# Altium PCB signal_proccessing.PcbDoc
Units mil, origin at the board's own origin, x right, y up, seen from the top; angles counter-clockwise.
Board outline 1992 x 2025 mil, 2 copper layers (Top Layer, Bottom Layer); 49 components, 27 nets, 186 pads, 391 vias.
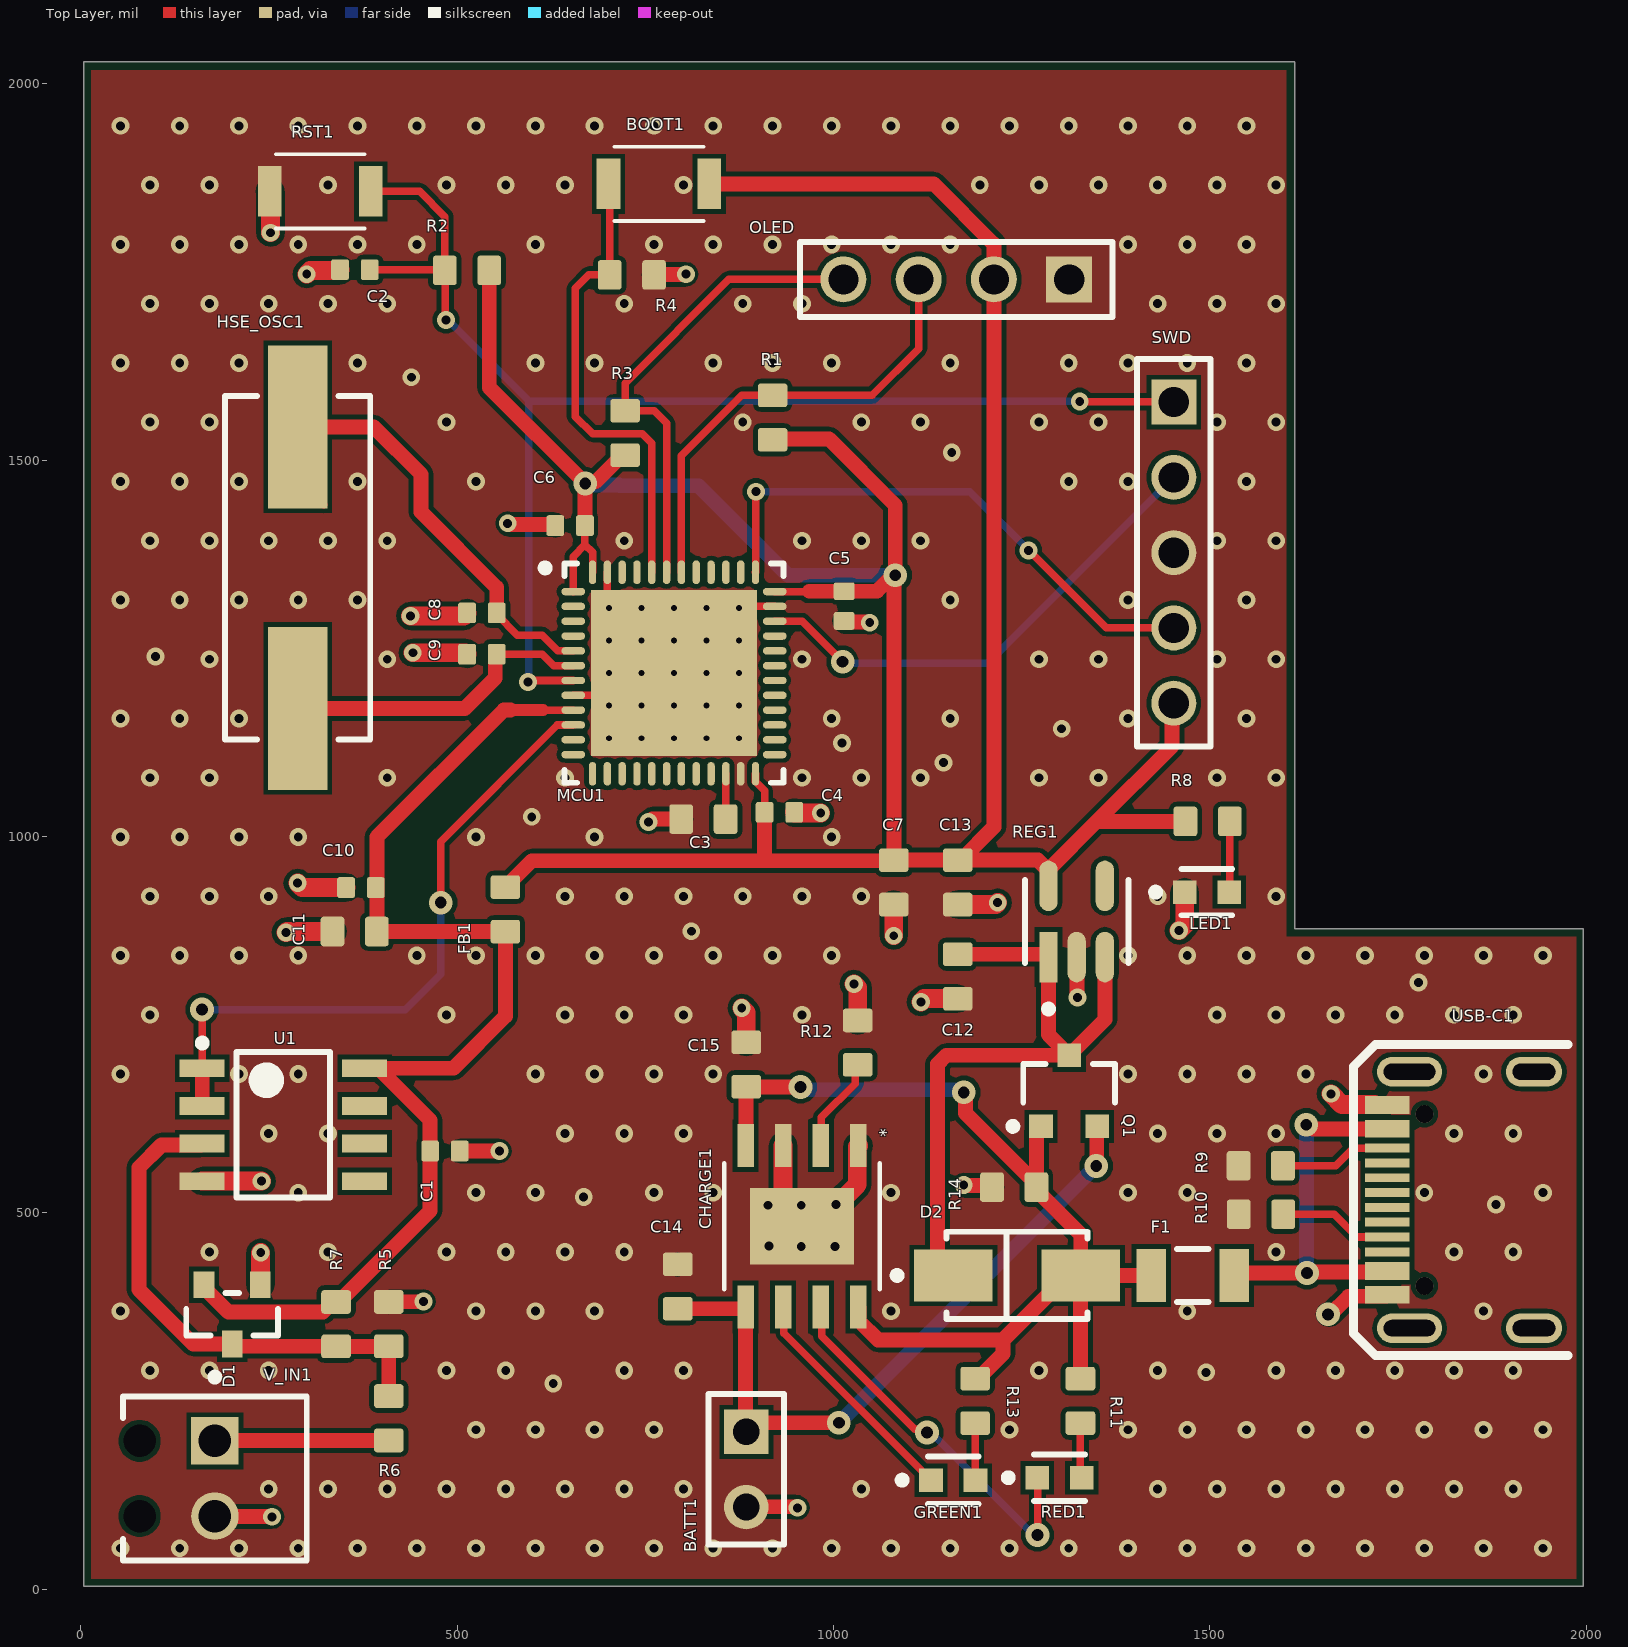
[diagram p0: Top Layer view]
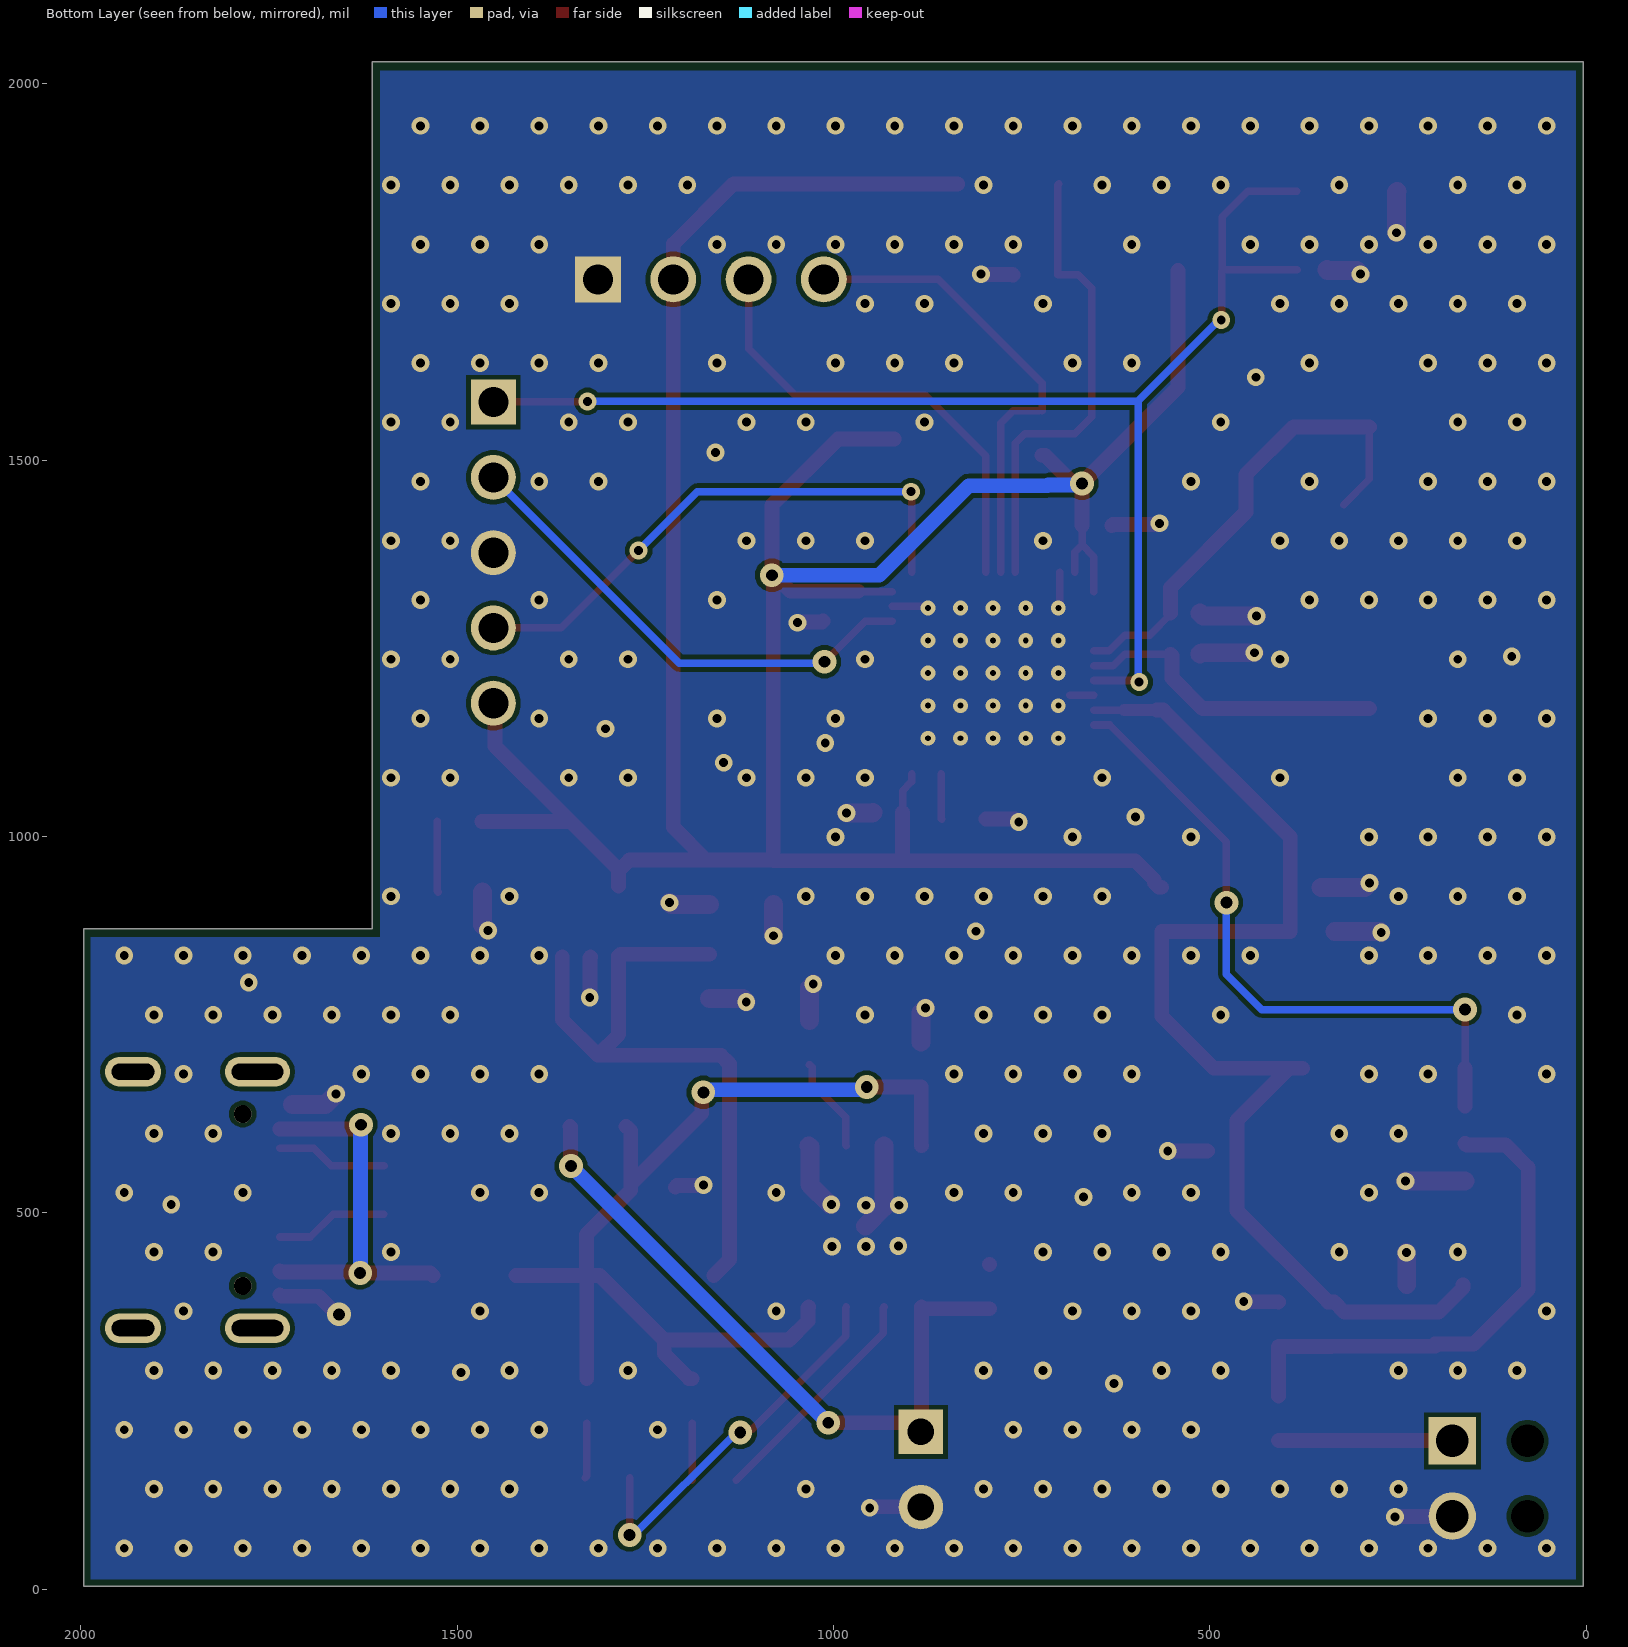
[diagram p1: Bottom Layer view, seen from below]
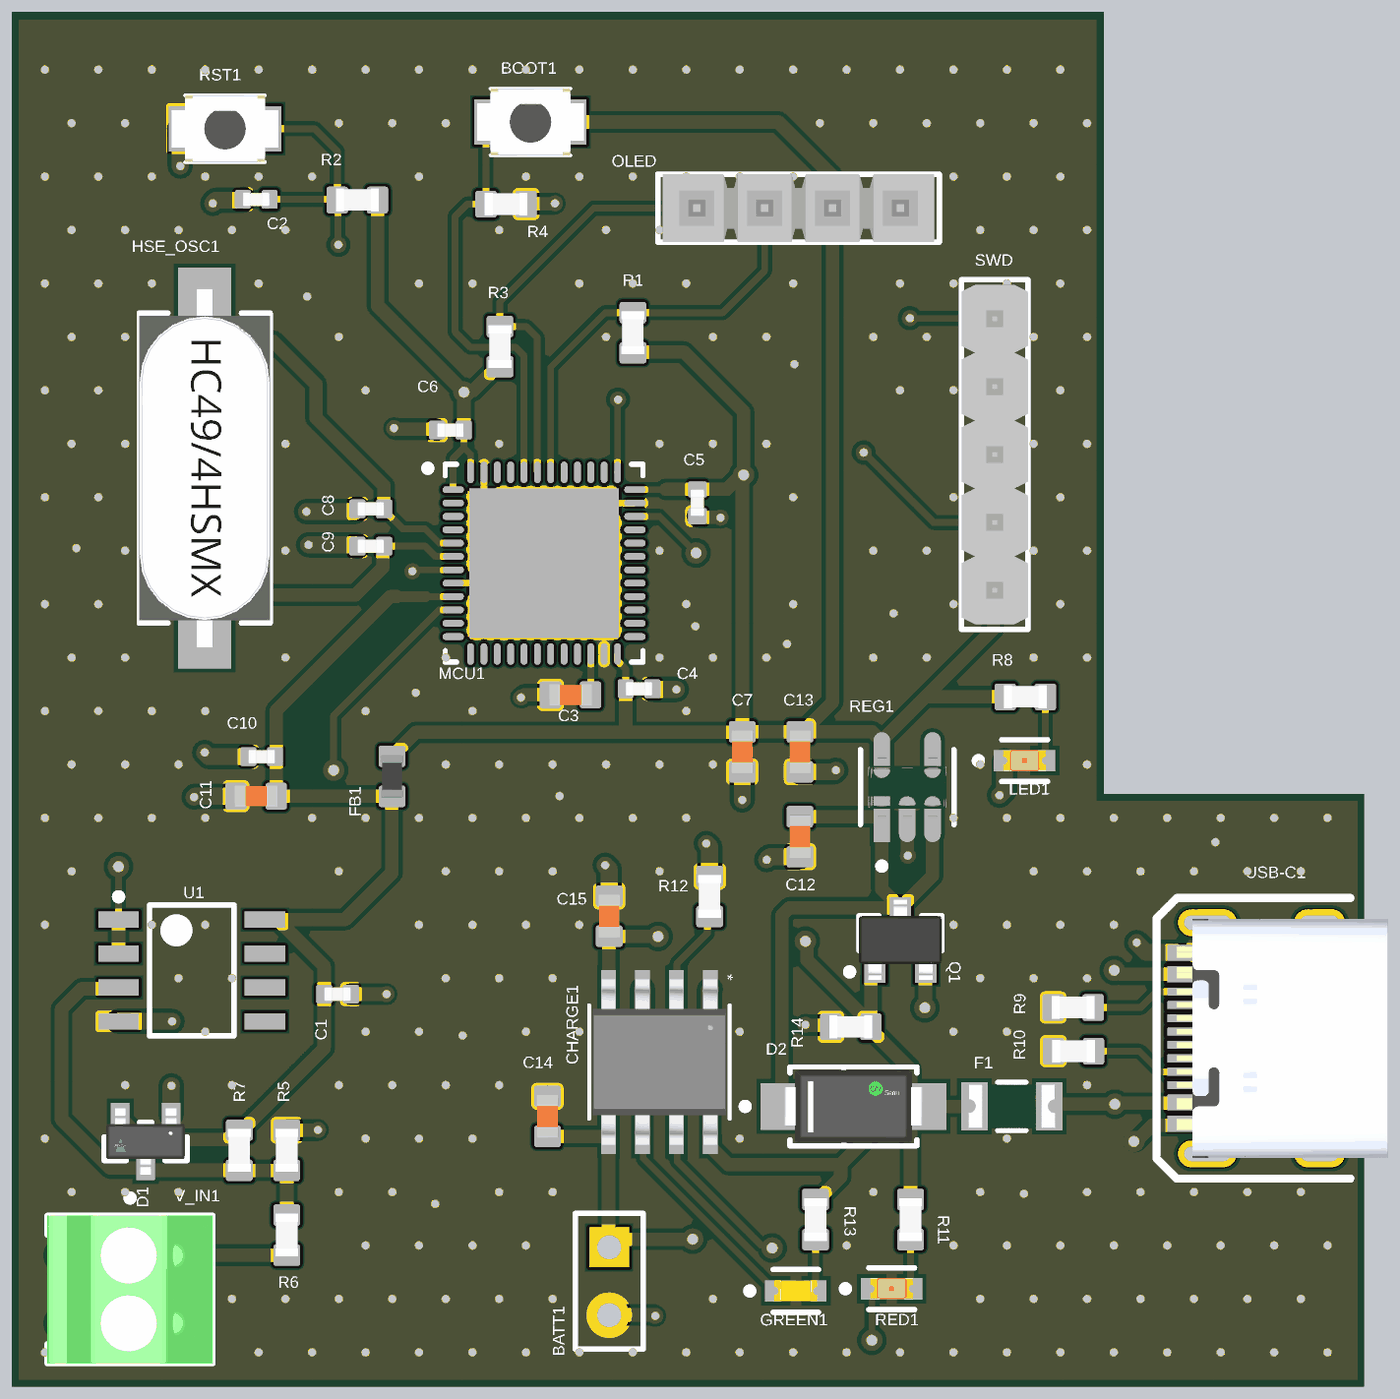
[diagram p2: 3D render of the assembled board from above, using the file's embedded part models]

## Layer stack, top to bottom
Top Solder: solder mask 0.4, Solder Resist, Dk 3.5
Top Layer: signal copper 1.4
Dielectric 1: dielectric 12.6, FR-4, Dk 4.8
Bottom Layer: signal copper 1.4
Bottom Solder: solder mask 0.4, Solder Resist, Dk 3.5

## Board outline
4,4 4,2029 1613,2029 1613,877 1996,877 1996,4

## Design rules (kind name [scope] priority, off if disabled: settings)
Clearance [All] p1: gap=6 ignorepadtopadclearanceinfootprint=FALSE
MinimumSolderMaskSliver [All] p1: minsoldermaskwidth=1
PlaneConnect [All] p1: planeconnectstyle=Direct reliefexpansion=20 reliefentries=4 reliefconductorwidth=10 reliefairgap=10
PolygonConnect [All] p1: connectstyle=Direct reliefconductorwidth=10 reliefentries=4 polygonreliefangle="90 Angle" airgapwidth=10
RoutingVias [All] p1: holewidth=28 width=50 viastyle="Through Hole" minholewidth=0 minwidth=0 maxholewidth=393.7 maxwidth=393.7
SilkToSilkClearance [All] p1: silktosilkclearance=4
SilkToSolderMaskClearance [IsPad] p1: minsilkscreentomaskgap=6 clearancetoexposedcopper=TRUE
SolderMaskExpansion [All] p1: expansion=4 istentingtop=FALSE
SupplyNets "Schematic Supply Nets_3" [InNet('3V3')] p1: voltage=0.000
SupplyNets "Schematic Supply Nets_2" [InNet('5V')] p2: voltage=0.000
SupplyNets "Schematic Supply Nets_1" [InNet('GND')] p3: voltage=0.000
SupplyNets "Schematic Supply Nets" [InNet('VBUS')] p4: voltage=0.000
Width [All] p1: maxlimit=25 minlimit=2 preferedwidth=10 bottomlayer_minwidth=6 minimp=50.000000 maximp=50.000000 favimp=50.000000
26 further rules are at their usual default settings.

## Components (designator, comment, footprint, x,y, rotation, side; value= is the part's Value field where it differs from the comment)
BATT1 "Header 2" HDR1X2 884,209 r270 top
BOOT1 "B3U-1000PM" SW_B3U-1000PM 768,1867 r0 top
C1 "100nF" CAP_0402 483.69,582 r180 top
C2 "100nF" CAP_0402 364,1753 r0 top
C3 "2.2uF" CAP_0603 827,1023 r0 top
C4 "100nF" CAP_0402 928,1032 r180 top
C5 "100nF" CAP_0402 1014,1306 r90 top
C6 "100nF" CAP_0402 650,1413 r0 top
C7 "10uF" CAP_0603 1080,939 r90 top
C8 "12pF" CAP_0402 532.68,1297 r0 top
C9 "12pF" CAP_0402 532.68,1242 r0 top
C10 "100nF" CAP_0402 372,932 r0 top
C11 "1uF" CAP_0603 363.7,873.7 r0 top
C12 "1uF" CAP_0603 1165,814 r270 top
C13 "10uF" CAP_0603 1165,939 r90 top
C14 "10uF" CAP_0603 793,402 r90 top
C15 "10uF" CAP_0603 884,697 r270 top
CHARGE1 "TP4056" ESOP8_UMW 958,482 r270 top
D1 "BAT54S-E3-08" FP-6_541-5014_01-4-MFG 201,365 r270 top value=10pF
D2 "SS14" FP-403AE-MFG 1243.79,416.67 r180 top
F1 "1206L050/15YR" FP-1206L-MFG 1477.22,416.67 r180 top value=0.15-0.75Ω
FB1 "FB0603" FB_0603 564,903 r90 top
GREEN1 "LTST-C191GKT" FP-LTST-C191GKT-MFG 1159,144.74 r0 top
HSE_OSC1 "LFXTAL003210BULK" FP-LFXTAL003210BULK-MFG 288,1357 r270 top
LED1 "LTST-C191KRKT" FP-LTST-C191KRKT-MFG 1496,926 r0 top
MCU1 "STM32F411CEU6" STM-UFQFPN48_L 788,1217 r0 top locked
OLED "TSW-104-08-F-S" SMTC-TSW-104-08-X-S 1313,1740 r180 top
Q1 "AO3401A" AO-SOT-23-3L_V 1313,662 r90 top
R1 "4.7k" RES_0603 918.94,1556.53 r270 top
R2 "10k" RES_0603 513,1752 r0 top
R3 "4.7k" RES_0603 723,1536 r90 top
R4 "10k" RES_0603 732,1746 r0 top
R5 "28.7k" RES_0603 409,352 r270 top
R6 "100k" RES_0603 409,227 r270 top
R7 "22k" RES_0603 339,352 r90 top
R8 "1k" RES_0603 1497,1020 r0 top
R9 "5.1k" RES_0603 1567.56,562.37 r180 top
R10 "5.1k" RES_0603 1568,498 r180 top
R11 "1k" RES_0603 1328,250 r270 top
R12 "2.4k" RES_0603 1032,726 r270 top
R13 "1k" RES_0603 1188,250 r90 top
R14 "100k" RES_0603 1240,534 r180 top
RED1 "LTST-C191KRKT" FP-LTST-C191KRKT-MFG 1300.14,148.02 r0 top
REG1 "AP2112K-3.3TRG1" FP-SOT25-IPC_A 1323,887 r90 top
RST1 "B3U-1000PM" SW_B3U-1000PM 318,1857 r0 top
SWD "MTLW-105-05-T-S-190" SMTC-MTLW-105-05-X-S-190 1452,1577 r270 top
U1 "LMV358DR2G" ONSC-SOIC-8-751-07_V 269,617 r0 top
USB-C1 "TYPE-C-31-M-12" TYPE-C-31-M-12 1848,517 r90 top
V_IN1 "1725656" PHOE-1725656-2 178,147 r270 top

## Footprints (in the part's own frame and the unit in brackets; to place one, negate y for a bottom-side part, rotate by r counter-clockwise, add the part's x,y. Pads: shape width x height; smd on the part's side, far side on the other; paste and mask are expansions set on the pad)
AO-SOT-23-3L_V [mm] "SOT23, 3-Leads, Body 3.1x1.8mm, Pitch 0.95mm"
  rect 0.8x0.8 smd: 1(-1.2,0.95) 2(-1.2,-0.95) 3(1.2,0)
  silkscreen extent -1.32,-1.55 0.9,2.02, body extent -1.5,-1.55 1.5,1.55, height 1.25
CAP_0402 [mm]
  rrect25% 0.6x0.7 smd: 1(-0.5,0) 2(0.5,0)
  body extent -0.5,-0.26 0.5,0.26, height 0.37
CAP_0603 [mm]
  rrect25% 0.8x1 smd: 1(-0.75,0) 2(0.75,0)
  body extent -0.8,-0.4 0.8,0.4, height 0.51
ESOP8_UMW [mil]
  rect 57.28x21.97 smd paste+0 mask+0: 1(-107.14,75) 2(-107.14,25) 3(-107.14,-25) 4(-107.14,-75) 5(107.14,-75) 6(107.14,-25) 7(107.14,25) 8(107.14,75)
  rect 102x138 smd paste-68.5 mask+0: 9(0,0)
  silkscreen extent -84,-104 84,104, body extent -122,-99 122,99, height 67
FB_0603 [mm]
  rrect25% 0.8x1 smd: 1(-0.75,0) 2(0.75,0)
  body extent -0.8,-0.4 0.8,0.4, height 0.81
FP-6_541-5014_01-4-MFG [mm]
  rect 0.9x0.7 smd paste+0 mask+0: 1(-1,0.95) 2(-1,-0.95) 3(1,0)
  silkscreen extent -0.71,-1.55 0.71,1.55, body extent -1.55,-1.65 1.55,1.65, height 0.25
FP-403AE-MFG [mm]
  rect 2.65x1.75 smd paste+0 mask+0: 1(-2.15,0) 2(2.15,0)
  silkscreen extent -2.37,-1.48 4.17,1.48, body extent -3.57,-1.58 3.57,1.58, height 0.25
FP-1206L-MFG [mm]
  rect 1x1.8 smd paste+0 mask+0: 1(-1.4,0) 2(1.4,0)
  silkscreen extent -0.53,-0.9 0.53,0.9, body extent -2,-1 2,1, height 0.25
FP-LFXTAL003210BULK-MFG [mm]
  rect 5.5x2 smd paste+0 mask+0: 1(-4.75,0) 2(4.75,0)
  silkscreen extent -5.8,-2.45 5.8,2.45, body extent -7.6,-2.55 7.6,2.55, height 0.25
FP-LTST-C191GKT-MFG [mm]
  rect 0.8x0.8 smd paste+0 mask+0: 1(-0.75,0) 2(0.75,0)
  silkscreen extent -1.85,-0.8 0.85,0.8, body extent -1.25,-0.55 1.25,0.55, height 0.25
FP-LTST-C191KRKT-MFG [mm]
  rect 0.8x0.8 smd paste+0 mask+0: 1(-0.75,0) 2(0.75,0)
  silkscreen extent -1.86,-0.78 0.86,0.78, body extent -1.25,-0.55 1.25,0.55, height 0.25
FP-SOT25-IPC_A [mm]
  rect 1.707x0.616 smd paste+0 mask+0: 1(-1.201,0.95)
  rrect100% 1.707x0.616 smd paste+0 mask+0: 2(-1.201,0) 3(-1.201,-0.95) 4(1.201,-0.95) 5(1.201,0.95)
  silkscreen extent -3.08,-1.75 1.4,1.75, body extent -2.55,-2 2.55,2, height 0.25
HDR1X2 [mm] "Connector; Header; 2 Position"
  rect 1.5x1.5 hole 0.9: 1(0,0)
  round 1.5 hole 0.9: 2(2.54,0)
  silkscreen extent -1.27,-1.27 3.81,1.27
ONSC-SOIC-8-751-07_V [mm] "SOIC, 8-Leads, Body 4.9x3.9mm, Pitch 1.27mm"
  rect 1.52x0.6 smd: 1(-2.74,1.905) 2(-2.74,0.635) 3(-2.74,-0.635) 4(-2.74,-1.905) 5(2.74,-1.905) 6(2.74,-0.635) 7(2.74,0.635) 8(2.74,1.905)
  silkscreen extent -2.86,-2.45 1.58,2.88, body extent -1.95,-2.45 1.95,2.45, height 1.75
PHOE-1725656-2 [mm] "Connector, 2-Leads, Body 6.2x5.4mm, Pitch 2.54mm"
  rect 1.6x1.6 hole 1.1: 1(-1.27,0)
  round 1.6 hole 1.1: 2(1.27,0)
  round 0 hole 1.1 unplated: MH1(-1.27,-2.54) MH2(1.27,-2.54)
  silkscreen extent -3.54,-3.1 2.77,3.1, body extent -2.77,-3.1 2.77,3.1, height 9
RES_0603 [mm]
  rrect25% 0.8x1 smd: 1(-0.75,0) 2(0.75,0)
  body extent -0.8,-0.43 0.8,0.43, height 0.52
SMTC-MTLW-105-05-X-S-190 [mm] "Terminal Assembly, 1x5 Pins, Vertical, 2.54mm Pitch, Male"
  rect 1.52x1.52 hole 1.02: 1(0,0)
  round 1.52 hole 1.02: 2(2.54,0) 3(5.08,0) 4(7.62,0) 5(10.16,0)
  silkscreen extent -1.46,-1.24 11.62,1.24, body extent -1.27,-1.24 11.43,1.24, height 6.35
SMTC-TSW-104-08-X-S [mm] ".025 SQ Post Terminal Strip Assembly, 1x4 Pins, Vertical, 2.54mm Pitch, Male"
  rect 1.55x1.55 hole 1.02: 1(0,0)
  round 1.55 hole 1.02: 2(2.54,0) 3(5.08,0) 4(7.62,0)
  silkscreen extent -1.46,-1.27 9.08,1.27, body extent -1.27,-1.27 8.89,1.27, height 8.38
STM-UFQFPN48_L [mm] "QFN, 48-Leads, Body 7.1x7.1mm, Pitch 0.5mm, Thermal Pad 5.6x5.6mm, IPC High Density"
  oval 0.8x0.25 smd: 1(-3.4,2.75) 2(-3.4,2.25) 3(-3.4,1.75) 4(-3.4,1.25) 5(-3.4,0.75) 6(-3.4,0.25) 7(-3.4,-0.25) 8(-3.4,-0.75) 9(-3.4,-1.25) 10(-3.4,-1.75) 11(-3.4,-2.25) 12(-3.4,-2.75) 25(3.4,-2.75) 26(3.4,-2.25) 27(3.4,-1.75) 28(3.4,-1.25) 29(3.4,-0.75) 30(3.4,-0.25) 31(3.4,0.25) 32(3.4,0.75) 33(3.4,1.25) 34(3.4,1.75) 35(3.4,2.25) 36(3.4,2.75)
  oval 0.25x0.8 smd: 13(-2.75,-3.4) 14(-2.25,-3.4) 15(-1.75,-3.4) 16(-1.25,-3.4) 17(-0.75,-3.4) 18(-0.25,-3.4) 19(0.25,-3.4) 20(0.75,-3.4) 21(1.25,-3.4) 22(1.75,-3.4) 23(2.25,-3.4) 24(2.75,-3.4) 37(2.75,3.4) 38(2.25,3.4) 39(1.75,3.4) 40(1.25,3.4) 41(0.75,3.4) 42(0.25,3.4) 43(-0.25,3.4) 44(-0.75,3.4) 45(-1.25,3.4) 46(-1.75,3.4) 47(-2.25,3.4) 48(-2.75,3.4)
  rect 5.6x5.6 smd: 49(0,0)
  silkscreen extent -4.47,-3.7 3.7,3.7, body extent -3.55,-3.55 3.55,3.55, height 0.6
SW_B3U-1000PM [mm]
  rect 0.8x1.7 smd paste+0 mask+0.102: 1(-1.7,0) 2(1.7,0)
  silkscreen extent -1.5,-1.25 1.5,1.25, body extent -2,-1.25 2,1.25, height 1.75
TYPE-C-31-M-12 [mm]
  rect 0.6x1.5 smd mask+0.07: A1B12(-3.2,2.85) B1A12(3.2,2.85)
  rect 0.6x1.5 smd mask+0.14: A4B9(-2.4,2.85) B4A9(2.4,2.85)
  rect 0.3x1.5 smd mask+0.14: A5(-1.25,2.85) A6(-0.25,2.85) A7(0.25,2.85) A8(1.25,2.85) B5(1.75,2.85) B6(0.75,2.85) B7(-0.75,2.85) B8(-1.75,2.85)
  round 0.6 hole 0.6 unplated mask+0.3: MH(-2.9,1.6) MH(2.9,1.6)
  oval 1x1.9 hole 0.55 slot 1.45 at 90 deg mask+0.05: SH(-4.325,-2.1) SH(4.325,-2.1)
  oval 1x2.2 hole 0.55 slot 1.75 at 90 deg mask+0.05: SH(-4.325,2.1) SH(4.325,2.1)
  silkscreen extent -5.25,-3.25 5.25,4, body extent -4.47,-4.65 4.47,3.25, height 3.32

## Part data
BATT1: "Header, 2-Pin", LatestRevisionDate=17-Jul-2002, LatestRevisionNote="Re-released for DXP Platform.", Publisher="Altium Limited"
BOOT1 RST1: "Top, w/o Boss 1k Reel", Package="Custom Package Omron", Check_prices=https://www.snapeda.com/parts/B3U-1000PM/Omron/view-part/?ref=eda, MF=Omron, MP=B3U-1000PM, SnapEDA_Link=https://www.snapeda.com/parts/B3U-1000PM/Omron/view-part/?ref=snap
C1 C2 C4 C5 C6 C8 C9 C10: library part CAP_0402, "Capacitor SMD 0402"
C3 C7 C11 C12 C13 C14 C15: library part CAP_0603, "Capacitor SMD 0603"
CHARGE1: "Description", Manufacturer_Name="UMW(Youtai Semiconductor Co., Ltd.)", Copyright="Copyright (C) 2025 Ultra Librarian. All rights reserved.", Manufacturer_Part_Number=TP4056, RefDes=RefDes, Type="Power Management"
D1: library part CMP-02539-000028-1, "DIODE ARRAY SCHOTTKY 30V SOT23", Capacitance=10pF, Forward Current=200mA, Manufacturer=Vishay, Max Junction Temp=+125°C, Max Repetitive Reverse Voltage=30V, Max Surge Forward Current=600mA, Package=6.541-5014.01-4, Peak Reverse Current=2uA, Temperature="-55°C to +125°C", Temperature Range Low=-55°C, Automotive=No, Category=Diode, ComponentLink2Description=Datasheet, ComponentLink2URL=http://www.vishay.com/docs/85508/bat54.pdf, Device Class L1="Discrete Semiconductors", Device Class L2=Diodes, Device Class L3="Schottky Diodes", Digikey Description="DIODE ARRAY SCHOTTKY 30V SOT23", Height=1.15mm, Lead Free=Yes, Manufacturer Part Number=BAT54S-E3-08, Mouser Description="Schottky Diodes & Rectifiers 200mA 30 Volt", Octopart=https://octopart.com/bat54s-e3-08-vishay-29186616, RoHS=TRUE, Temperature Range High=+125°C
D2: library part CMP-2000-04943-2, "DIODE SCHOTTKY 40V 1A SMA", Forward Current=1A, Manufacturer="ON Semiconductor", Max Junction Temp=+125°C, Max Repetitive Reverse Voltage=40V, Max Surge Forward Current=40A, Package=403AE, Peak Reverse Current=0.2mA, Temperature="-65°C to +125°C", Temperature Range Low=-65°C, Automotive=No, Category=Diode, ComponentLink2Description=Datasheet, ComponentLink2URL=https://www.onsemi.com/pub/Collateral/SS19-D.PDF, Device Class L1="Discrete Semiconductors", Device Class L2=Diodes, Device Class L3="Schottky Diodes", Digikey Description="DIODE SCHOTTKY 40V 1A SMA", Height=2.5mm, Lead Free=Yes, Manufacturer Part Number=SS14, Mouser Description="Schottky Diodes & Rectifiers SMA 40V 1.0A", Octopart=https://octopart.com/ss14-on+semiconductor-29205033, RoHS=TRUE, Standoff Height=0.05mm, Temperature Range High=+125°C
F1: library part CMP-08606-000030-1, "PTC RESET FUSE 15V 500MA 1206", Ambient Temperature Range High=+85°C, Ambient Temperature Range Low=-40°C, Current Rating=100A, Hold Current=0.5A, Manufacturer="Littelfuse Inc", Package=1206L, Resistance=0.15-0.75Ω, Temperature="-40°C to +85°C", Trip Current=1A, Voltage Rating=15V, Automotive=No, Category=Fuse, ComponentLink2Description=Datasheet, ComponentLink2URL=https://www.littelfuse.com/~/media/electronics/datasheets/resettable_ptcs/littelfuse_ptc_1206l_datasheet.pdf.pdf, Device Class L1="Circuit Protection", Device Class L2="PTC Resettable Fuses", Device Class L3=unset, Digikey Description="PTC RESET FUSE 15V 500MA 1206", Height=0.75mm, Lead Free=Yes, Manufacturer Part Number=1206L050/15YR, Mouser Description="Resettable Fuses - PPTC 15V 1206 .500A POLYFUSE", Octopart=https://octopart.com/1206l050%2F15yr-littelfuse-673645, RoHS=TRUE, Temperature Range High=+85°C, Temperature Range Low=-40°C, Trip Time=0.1s
FB1: library part FB_0603, "Ferrite Bead SMD 0603"
GREEN1: library part CMP-22017-000029-1, "LED GREEN CLEAR CHIP SMD", Case Code (Metric)=1608, Case Code (Imperial)=0603, Color=Green, Forward Current=30mA, Forward Voltage=2.1V, Lens Color=Colorless, Max Operating Temperature=85°C, Min Operating Temperature=-55°C, Package Quantity=1, Power Dissipation=100mW, Reverse Voltage=5V, Test Current=20mA, Case/Package=0603, Depth=0.8mm, Dominant Wavelength=569nm, Height=0.55mm, Lead Free="Lead Free", Length=1.6mm, Lens Style=Clear, Lens Transparency=Clear, Luminous Intensity=12mcd, Mount="Surface Mount", Number of Elements=1, Number of LEDs=1, Number of Pins=2, Packaging="Tape and Reel", Power Rating=100mW, Radiation Hardening=No, Viewing Angle=130°, Wavelength=565nm, Width=0.8mm, Illumination Color=Green
HSE_OSC1: library part CMP-96504-000002-1, "CRYSTAL 12.0MHZ 16PF SMD", Frequency=12MHz, Load Capacitance=16pF, Manufacturer="IQD Frequency Products", Temperature="-10°C to +60°C", Temperature Range High=+60°C, Temperature Range Low=-10°C, Tolerance=30ppm, Automotive=No, Category=Crys, ComponentLink2Description=Datasheet, ComponentLink2URL=https://www.iqdfrequencyproducts.com/products/pn/LFXTAL003210Bulk.pdf, Device Class L1="Passive Components", Device Class L2="Crystals / Oscillators", Device Class L3=Crystals, Digikey Description="CRYSTAL 12.0MHZ 16PF SMD", Esr=40Ω, Height=4.3mm, Lead Free=Yes, Manufacturer Part Number=LFXTAL003210BULK, Octopart=https://octopart.com/lfxtal003210bulk-iqd+frequency+products-20904063, Package=LFXTAL003210BULK, RoHS=TRUE, Series=HC49/4HSMX, Stability=50ppm
LED1 RED1: library part CMP-2000-05199-2, Case Code (Metric)=1608, Case Code (Imperial)=0603, Color=Red, Current=2A, Forward Current=20mA, Forward Voltage=2V, Lens Color=Colorless, Max Operating Temperature=85°C, Min Operating Temperature=-55°C, Power Dissipation=75mW, Reverse Voltage=5V, Case/Package=0603, Depth=800µm, Dominant Wavelength=631nm, Height=550µm, Lead Free="Lead Free", Length=1.6mm, Lens Style=Clear, Lens Transparency=Clear, Luminous Intensity=54mcd, Mount="Surface Mount", NexarPartId=549908, Number of Elements=1, Number of LEDs=1, Number of Pins=2, Packaging="Tape and Reel", Power Rating=75mW, Radiation Hardening=No, RoHS=Compliant, Schedule B="8541402000, 8541402000", Test Current=20mA, Viewing Angle=130°, Voltage=2V, Wavelength=639nm, Width=800µm, Illumination Color=Red
MCU1: library part CMP-0243-00165-1, "ARM Cortex-M4 32-bit MCU+FPU, 512 KB Flash, 128 KB RAM, 36 I/Os, 48-Pin UFQFPN, -40 to 85 degC, Tray", Operating Frequency(F) (Processor speed) (MHz)=100, Package Description=UFQFPN48, Package Reference="48-Pin Ultra Thin Fine Pitch Quad Flat No-Lead, 7 x 7 x 0.6 mm Body, 0.5 mm Pitch, Exposed Pad", Supply Voltage(Vcc) min (V)=1.7, I/Os (High Current)=36, ComponentLink1Description="Manufacturer URL", ComponentLink1URL=http://www.st.com/, ComponentLink2Description=Datasheet, ComponentLink2URL=http://www.st.com/st-web-ui/static/active/en/resource/technical/document/datasheet/DM00115249.pdf, Core="ARM Cortex-M4", DatasheetVersion="Rev. 6", FLASH Size (Prog) (kB)=512, Mounting Technology="Surface Mount", Packing=Tray, Internal RAM Size (kB)=128
OLED: library part CMP-1024-00355-1, "0.025\" SQ Post Header, Through-hole, Vertical, -55 to 125 degC, 2.54 mm Pitch, 4-Pin, Male, RoHS", Manufacturer=Samtec, Temperature Range="-55 to 125 degC", ComponentLink1Description="Manufacturer URL", ComponentLink1URL=http://www.samtec.com, ComponentLink2Description=Datasheet, ComponentLink2URL=http://www.samtec.com/documents/webfiles/pdf/TSW_TH.PDF, ComponentLink3Description="Package Specification", ComponentLink3URL=http://www.samtec.com/documents/webfiles/cpdf/TSW-XXX-XX-XXX-X-XX-XXX-MKT.pdf, DatasheetVersion=F-214, Mounting Technology=Through-hole, Orientation=Vertical, PackageDescription=".025[0.64] SQ. Post Terminal Strip Assembly", PackageReference=TSW-104-08-X-S, PackageVersion="DM, 8/1988", PartNumber=TSW-104-08-F-S, Pitch="2.54 mm", RoHS=True
Q1: library part CMP-2000-05778-1, "P-Channel MOSFET, 30 V, 4 A, -55 to 150 degC, 3-Pin SOT-23-3L, RoHS, Tape and Reel", Continuous Drain Current=4A, Drain-Source On-Volt=30V, Frequency (Max)=NotRequiredMHz, Gate-Source Voltage (Max)=?12V, Manufacturer="Alpha and Omega", Operating Temp Range=-55Cto150C, Operating Temperature Classification=Military, Output Power (Max)=NotRequiredW, Package Description="3-Pin Small Outline Transistor, Body 2.95 x 1.6 mm, Pitch 0.95 mm", Package Reference=SOT-23-3L, Package Type=SOT-23, Power Dissipation=1.4W, Power Gain=NotRequireddB, Channel Mode=Enhancement, Datasheet URL=http://www.aosmd.com/res/data_sheets/AO3401A.pdf, Datasheet Version="Rev. 3, 03/2011", Drain Current (Max)=4A, Drain Efficiency=NotRequired%, Drain-Source On-Res=0.044ohm, Manufacturer URL=http://www.aosmd.com/, Mounting=SurfaceMount, Mounting Technology=SurfaceMount, Noise Figure=NotRequireddB, Number of  Elements=1, Package URL=http://www.aosmd.com/res/packaging_information/SOT-23-3L.pdf, Pin Count=3, Polarity=P, Rad Hardened=No, Type=PowerMOSFET
R1 R2 R3 R4 R5 R6 R7 R8 R9 R10 R11 R12 R13 R14: library part RES_0603, "Resistor SMD 0603"
REG1: library part CMP-12756-000035-1, "IC REG LINEAR 3.3V 600MA SOT25", Case/Package=SOT-23-5, Dropout Voltage=250mV, Max Operating Temperature=85°C, Max Output Current=600mA, Max Input Voltage=6V, Min Operating Temperature=-40°C, Min Input Voltage=2.5V, Output Voltage=3.3V, Package Quantity=1, Quiescent Current=55uA, Accuracy=1.5%, Height=1.3mm, Lead Free="Lead Free", Length=3.1mm, Mount="Surface Mount", Number of Outputs=1, Number of Pins=5, Number of Regulators=1, Output Current=600mA, Output Type=Fixed, Packaging="Tape and Reel", Polarity=Positive, Width=1.7mm
SWD: library part CMP-1024-00077-1, "Low Profile .025\" SQ Post Header, Through-hole, Vertical, -55 to 105 degC, 2.54 mm Pitch, 5-Pin, Male, RoHS", Manufacturer=Samtec, Temperature Range="-55 to 105 degC", ComponentLink1Description="Manufacturer URL", ComponentLink1URL=http://www.samtec.com, ComponentLink2Description=Datasheet, ComponentLink2URL=http://www.samtec.com/documents/webfiles/pdf/MTLW_TH.PDF, ComponentLink3Description="Package Specification", ComponentLink3URL=http://www.samtec.com/documents/webfiles/cpdf/MTLW-1XX-XX-XX-X-XXX-XX-XX-MKT1.pdf, DatasheetVersion=F-214, Mounting Technology=Through-hole, Orientation=Vertical, PackageDescription="Low Profile Terminal Assembly", PackageReference=MTLW-105-05-X-S-190, PackageVersion="T, 6/1991", PartNumber=MTLW-105-05-T-S-190, Pitch="2.54 mm", RoHS=True
U1: library part CMP-1310-00286-1, "Dual Low-Voltage, Rail-to-Rail Operational Amplifier, 2.7 to 5.5 V, -40 to 85 degC, 8-Pin SOIC, Pb-Free, Tape and Reel", Manufacturer="On Semiconductor", ComponentLink1Description="Manufacturer URL", ComponentLink1URL=http://www.onsemi.com/, ComponentLink2Description=Datasheet, ComponentLink2URL=http://www.onsemi.cn/pub_link/Collateral/LMV321-LMV358-LMV324-D.PDF, ComponentLink3Description="Package Specification", ComponentLink3URL=http://www.onsemi.com/pub_link/Collateral/751-07.PDF, DatasheetVersion="Rev. 10", GBW Typ (MHz)=1, Mounting Technology="Surface Mount", PackageDescription="8-Pin Small Outline Integrated Circuit, Body 4.9 x 3.9 mm, Pitch 1.27 mm", PackageReference=SOIC-8-751-07, PackageVersion="Rev. AK, 02/2011", Packing="Tape and Reel", PartNumber=LMV358DR2G, RoHS=TRUE, SR Typ (V/uS)=1, VCC Max (V)=5.5, VCC Min (V)=2.7
USB-C1: "USB Type C Connector Horizontal SMT", Manufacturer="Koren Hroparts", Manufacturer Part Number=TYPE-C-31-M-12
V_IN1: library part CMP-2000-05299-1, "Male Header, Pitch 2.54 mm, 1 x 2 Position, Height 9 mm, Tail Length 3.5 mm", Colour=Green, Manufacturer="Phoenix Contact", Content=250pc(s), Datasheet URL=http://datasheet.octopart.com/1725656-Phoenix-Contact-datasheet-5302866.pdf, Datasheet Version=Apr-08, Manufacturer part No.=1725656, Manufacturer URL=http://www.phoenixcontact.com/, Number of contacts=2, Pitch=2.54mm, Type=MPT0,5/2-2,54, Industrial packaging=Yes

## Via types
v1: diameter 23.62, hole 11.81, Top Layer to Bottom Layer, tented both sides, 352 vias
v2: diameter 19.68, hole 7.87, Top Layer to Bottom Layer, tented both sides, 25 vias
v3: diameter 31.5, hole 15.75, Top Layer to Bottom Layer, tented both sides, 14 vias

## Nets (pads, with @x,y where several pads share a name; then routed paths per layer and width w, separated by ;. In a path a pad name is that pad's centre, name@x,y a point inside that pad or via, vN(x,y) a via of type N, cw(c..) or ccw(c..) an arc to the next point about the centre after c; other vN are vias at no path point)
3V3: BOOT1.2 C4.2 C5.2 C6.2 C7.2 C13.2 FB1.2 MCU1.1 MCU1.24 MCU1.36 MCU1.48 OLED.2 R1.2 R2.2 R3.1 R8.1 REG1.5 SWD.5 | length 4438.8
  Top Layer w10: MCU1.1 654.14,1371.77 669.69,1387.31 ; C6.2 669.69,1387.31 ; MCU1.48 679.73,1377.27 669.69,1387.31 ; MCU1.24 896.27,1072.47 896.35,1072.39 896.7,1072.39 908.31,1060.78 C4.2 ; MCU1.36 966.73,1325.27 967,1325
  Top Layer w19.68: R2.2 542.53,1596.47 v3(670,1469) ; FB1.2 567.94,932.53 573.84,938.43 573.84,942.37 599.16,967.69 908.31,967.69 ; C6.2 669.84,1413.16 669.84,1468.84 v3(670,1469) ; R3.1 719.06,1506.47 683.85,1471.26 672.26,1471.26 v3(670,1469) ; BOOT1.2 1133,1867 1213,1787 OLED.2 1213,1012.59 C13.2@1168.94,968.53 ; C4.2 908.31,967.69 ; R1.2@919.29,1528 994,1528 1082,1440 v3(1082,1347) ; 967.69,1325.69 C5.2 1057.49,1325.69 1078.8,1347 v3(1082,1347) ; C7.2@1079.16,967.69 908.31,967.69 ; REG1.5 REG1.5@1285.6,954.51 ; SWD.5 1449.82,1174.82 1449.82,1119.97 1349.85,1020 ; R8.1 1349.85,1020 ; v3(1082,1347) 1080.09,1345.09 1080.09,968.53 C13.2 C13.2@1168.94,968.53 ; C13.2@1168.94,968.53 1271.58,968.53 REG1.5@1285.6,954.51 ; REG1.5@1285.6,954.51 1285.6,955.75 1349.85,1020
  Bottom Layer w19.68: v3(670,1469) 672.26,1466.74 714.83,1466.74 715.57,1466 820.5,1466 939.5,1347 v3(1082,1347)
5V: C15.2 CHARGE1.4 CHARGE1.8 D2.1 F1.2 Q1.1 R11.1 R13.2 R14.1 | length 1419.1
  Top Layer w19.68: v3(956,667) 955.76,667.24 884.24,667.24 C15.2 883.5,666.97 CHARGE1.4@883.5,590.14 ; CHARGE1.8 1034.14,373.72 1034.14,356.06 1059.2,331 1225.05,331 ; v3(1173,660) 1175.26,657.74 1175.26,632.2 R14.1@1269.53,537.94 ; R13.2 1191.94,279.53 1225.05,312.64 1225.05,331 ; Q1.1 1269.53,608.68 R14.1@1269.53,537.94 ; R11.1 1328,416.24 D2.1 ; F1.2 D2.1 ; CHARGE1.4@883.5,590.14 883,589.64 CHARGE1.4 883.5,589.64 CHARGE1.4@883.5,590.14 ; 1225.05,331 1310.72,416.67 D2.1 ; R14.1@1269.53,537.94 R14.1 1269.53,530.06 1328.44,471.15 D2.1
  Bottom Layer w19.68: v3@956,668 960.5,663.5 1169.5,663.5 v3(1173,660)
ADC_CH1: MCU1.10 U1.1 U1.2 | length 880.9
  Top Layer w10: v3(161,770) 161,692.13 U1.1 ; v3(478,912) 478,992.91 633.11,1148.02 654.06,1148.02 MCU1.10
  Top Layer w19.68: U1.2 U1.1
  Bottom Layer w10: v3(161,770) 431,770 478,817 v3(478,912)
BAT+: BATT1.1 C14.1 CHARGE1.5 Q1.2 | length 920.9
  Top Layer w19.68: C14.1 881.86,372.47 CHARGE1.5@883,373.61 ; BATT1.1@883,209 CHARGE1.5@883,373.61 ; CHARGE1.5 CHARGE1.5@883,373.61 ; BATT1.1 896,221 v3(1007,221) ; v3(1349,562) 1349.7,562.7 1349.7,614.06 Q1.2
  Bottom Layer w19.68: v3(1007,221) 1007.5,221 1348.5,562 v3(1349,562)
BOOT0: BOOT1.1 MCU1.44 R4.1 | length 629.7
  Top Layer w10: BOOT1.1 702.47,1865.6 R4.1@702.47,1748.58 ; R4.1 675,1746 657,1728 657,1557.86 679.77,1535.09 745.71,1535.09 758.47,1522.33 MCU1.44
GND: BATT1.2 C1.1 C2.1 C3.1 C4.1 C5.1 C6.1 C7.1 C8.1 C9.1 C10.1 C11.1 C12.2 C13.1 C14.2 C15.1 CHARGE1.1 CHARGE1.3 CHARGE1.9 D1.1 LED1.1 MCU1.8 MCU1.23 MCU1.35 MCU1.47 MCU1.49 OLED.1 R4.2 R5.1 R9.2 R10.2 R12.1 R14.2 REG1.2 RST1.1 SWD.3 U1.4 USB-C1.A1B12 USB-C1.B1A12 V_IN1.2 | length 1851.1
  Top Layer w10: MCU1.8 MCU1.49@686,1187.47 ; MCU1.49@699.42,1305.58 MCU1.47 ; v2(874.61,1303.61) 876.58,1305.58 MCU1.35
  Top Layer w19.68: V_IN1.2 178.5,96.5 253.5,96.5 v1(254,96) ; R5.1 409.24,381.76 454.76,381.76 v1(455,382) ; C1.1 v1(556,582) ; v1(567,1416) 568.5,1414.5 628.82,1414.5 C6.1 ; v1(754,1019) 755.07,1019 759.07,1023 C3.1 ; R4.2 762.03,1746.5 803.5,1746.5 v1(804,1747) ; C14.2@792.74,431.26 C14.2 ; BATT1.2 884.5,109.5 949.43,109.5 950.93,108 v1(952,108) ; C5.1 1015.56,1284.75 1047.25,1284.75 v1(1048,1284) ; v1(1173,537) 1173.75,536.25 1208.23,536.25 R14.2 ; REG1.2 1323.5,839.23 1323.5,786.5 v1(1324,786) ; v3(1657,365) 1660.2,365 1684.24,389.05 1733.83,389.05 USB-C1.A1B12
  Top Layer w25: U1.4 v1(240,542) ; D1.1 238.4,446.4 v1(239,447) ; RST1.1 252,1856.07 v1(252,1802) ; v1(272.35,872.35) 273.7,873.7 C11.1 ; v1(288,938) 294,932 C10.1 ; v1(300,1747) 304.72,1751.72 343.63,1751.72 344.32,1752.41 C2.1 ; v1(438,1293) 509,1293 511.72,1295.72 512.31,1295.72 513,1296.41 C8.1 ; v1(441,1244) 511,1244 511.72,1243.28 512.31,1243.28 513,1242.59 C9.1 ; v1(878,772) 884,766 C15.1 ; CHARGE1.3 933,507 CHARGE1.9 ; C4.1 947.68,1031.69 948.37,1031 v1(983,1031) ; v1(1003,511) 1005,511 1031.48,537.48 1031.48,587.62 CHARGE1.1 ; v1(1027,804) 1032,799 R12.1 ; v1(1080,868) C7.1 ; v1(1116,780) 1120.47,784.47 C12.2 ; C13.1 1215.47,909.47 v1(1218,912) ; v1(1459,875) 1466.47,882.47 LED1.1 ; v1(1661,658) 1675.33,643.67 USB-C1.B1A12@1718.77,643.67
  other v1: 52.61,54.28 131.35,54.28 210.09,54.28 288.83,54.28 367.57,54.28 446.31,54.28 525.05,54.28 603.79,54.28 682.53,54.28 761.27,54.28 840.01,54.28 918.75,54.28 997.49,54.28 1076.23,54.28 1154.97,54.28 1233.71,54.28 1312.45,54.28 1391.19,54.28 1469.93,54.28 1548.67,54.28 1627.41,54.28 1706.15,54.28 1784.89,54.28 1863.63,54.28 1942.37,54.28 249.46,133.02 328.2,133.02 406.94,133.02 485.68,133.02 564.42,133.02 643.16,133.02 721.9,133.02 800.64,133.02 1036.86,133.02 1430.56,133.02 1509.3,133.02 1588.04,133.02 1666.78,133.02 1745.52,133.02 1824.26,133.02 1903,133.02 525.05,211.76 603.79,211.76 682.53,211.76 761.27,211.76 1233.71,211.76 1391.19,211.76 1469.93,211.76 1548.67,211.76 1627.41,211.76 1706.15,211.76 1784.89,211.76 1863.63,211.76 1942.37,211.76 627.61,273.14 1495,288 91.98,290.51 170.72,290.51 249.46,290.51 485.68,290.51 564.42,290.51 721.9,290.51 800.64,290.51 1273.08,290.51 1430.56,290.51 1588.04,290.51 1666.78,290.51 1745.52,290.51 1824.26,290.51 1903,290.51 52.61,369.25 525.05,369.25 603.79,369.25 682.53,369.25 1076.23,369.25 1469.93,369.25 1863.63,369.25 170.72,447.99 328.2,447.99 485.68,447.99 564.42,447.99 643.16,447.99 721.9,447.99 1588.04,447.99 1824.26,447.99 1903,447.99 957,455 1002,455 914,456 913,510 957,510 1880,511 668,521 288.83,526.73 525.05,526.73 603.79,526.73 761.27,526.73 840.01,526.73 1076.23,526.73 1391.19,526.73 1469.93,526.73 1784.89,526.73 1942.37,526.73 249.46,605.47 328.2,605.47 643.16,605.47 721.9,605.47 800.64,605.47 1430.56,605.47 1509.3,605.47 1588.04,605.47 1824.26,605.47 1903,605.47 52.61,684.21 210.09,684.21 288.83,684.21 603.79,684.21 682.53,684.21 761.27,684.21 840.01,684.21 1391.19,684.21 1469.93,684.21 1548.67,684.21 1627.41,684.21 1863.63,684.21 91.98,762.95 485.68,762.95 643.16,762.95 721.9,762.95 800.64,762.95 958.12,762.95 1509.3,762.95 1588.04,762.95 1666.78,762.95 1745.52,762.95 1824.26,762.95 1903,762.95 1777,806 52.61,841.69 131.35,841.69 210.09,841.69 288.83,841.69 446.31,841.69 525.05,841.69 603.79,841.69 682.53,841.69 761.27,841.69 840.01,841.69 918.75,841.69 997.49,841.69 1391.19,841.69 1469.93,841.69 1548.67,841.69 1627.41,841.69 1706.15,841.69 1784.89,841.69 1863.63,841.69 1942.37,841.69 811,874 91.98,920.43 170.72,920.43 249.46,920.43 643.16,920.43 721.9,920.43 800.64,920.43 879.38,920.43 958.12,920.43 1036.86,920.43 1430.56,920.43 1588.04,920.43 52.61,999.17 131.35,999.17 210.09,999.17 288.83,999.17 525.05,999.17 682.53,999.17 997.49,999.17 599,1026 91.98,1077.91 170.72,1077.91 406.94,1077.91 643.16,1077.91 958.12,1077.91 1036.86,1077.91 1115.6,1077.91 1273.08,1077.91 1351.82,1077.91 1509.3,1077.91 1588.04,1077.91 1146,1098 1011,1124 1303,1143 52.61,1156.65 131.35,1156.65 210.09,1156.65 997.49,1156.65 1154.97,1156.65 1391.19,1156.65 1548.67,1156.65 170.72,1235.39 406.94,1235.39 958.12,1235.39 1273.08,1235.39 1351.82,1235.39 1509.3,1235.39 1588.04,1235.39 99,1239 52.61,1314.13 131.35,1314.13 210.09,1314.13 288.83,1314.13 367.57,1314.13 1154.97,1314.13 1391.19,1314.13 1548.67,1314.13 91.98,1392.87 170.72,1392.87 249.46,1392.87 328.2,1392.87 406.94,1392.87 721.9,1392.87 958.12,1392.87 1036.86,1392.87 1115.6,1392.87 1509.3,1392.87 1588.04,1392.87 52.61,1471.61 131.35,1471.61 210.09,1471.61 367.57,1471.61 525.05,1471.61 1312.45,1471.61 1391.19,1471.61 1548.67,1471.61 1157,1510 91.98,1550.35 170.72,1550.35 485.68,1550.35 879.38,1550.35 1036.86,1550.35 1115.6,1550.35 1273.08,1550.35 1351.82,1550.35 1509.3,1550.35 1588.04,1550.35 439,1610 52.61,1629.09 131.35,1629.09 210.09,1629.09 367.57,1629.09 603.79,1629.09 682.53,1629.09 840.01,1629.09 918.75,1629.09 997.49,1629.09 1154.97,1629.09 1312.45,1629.09 1391.19,1629.09 1469.93,1629.09 1548.67,1629.09 91.98,1707.83 170.72,1707.83 249.46,1707.83 328.2,1707.83 406.94,1707.83 721.9,1707.83 879.38,1707.83 958.12,1707.83 1430.56,1707.83 1509.3,1707.83 1588.04,1707.83 52.61,1786.57 131.35,1786.57 210.09,1786.57 288.83,1786.57 367.57,1786.57 446.31,1786.57 603.79,1786.57 761.27,1786.57 840.01,1786.57 918.75,1786.57 997.49,1786.57 1076.23,1786.57 1154.97,1786.57 1391.19,1786.57 1469.93,1786.57 1548.67,1786.57 91.98,1865.31 170.72,1865.31 328.2,1865.31 485.68,1865.31 564.42,1865.31 643.16,1865.31 800.64,1865.31 1194.34,1865.31 1273.08,1865.31 1351.82,1865.31 1430.56,1865.31 1509.3,1865.31 1588.04,1865.31 52.61,1944.05 131.35,1944.05 210.09,1944.05 288.83,1944.05 367.57,1944.05 446.31,1944.05 525.05,1944.05 603.79,1944.05 682.53,1944.05 761.27,1944.05 840.01,1944.05 918.75,1944.05 997.49,1944.05 1076.23,1944.05 1154.97,1944.05 1233.71,1944.05 1312.45,1944.05 1391.19,1944.05 1469.93,1944.05 1548.67,1944.05
  other v2: 701.39,1130.39 744.69,1130.39 788,1130.39 831.31,1130.39 874.61,1130.39 701.39,1173.69 744.69,1173.69 788,1173.69 831.31,1173.69 874.61,1173.69 701.39,1217 744.69,1217 788,1217 831.31,1217 874.61,1217 701.39,1260.31 744.69,1260.31 788,1260.31 831.31,1260.31 874.61,1260.31 701.39,1303.61 744.69,1303.61 788,1303.61 831.31,1303.61
HSE_IN: C8.2 HSE_OSC1.1 MCU1.5 | length 655
  Top Layer w10: HSE_OSC1.1 288,1475.11 HSE_OSC1.1@322.37,1440.74 ; C8.2@552.37,1295.03 579.99,1267.41 612.93,1267.41 633.74,1246.61 654.06,1246.61 MCU1.5
  Top Layer w19.68: HSE_OSC1.1 388.99,1544.01 452,1481 452,1431 552.37,1330.63 C8.2
HSE_OUT: C9.2 HSE_OSC1.2 MCU1.6 | length 419.6
  Top Layer w10: C9.2 613.07,1242 628.22,1226.84 MCU1.6
  Top Layer w19.68: HSE_OSC1.2 509.99,1169.99 550.4,1210.4 550.4,1240.03 C9.2
I2C_SCL: MCU1.42 OLED.3 R1.1 | length 625
  Top Layer w10: MCU1.42 797.84,1505.84 878.05,1586.05 R1.1 ; R1.1@915,1586.05 1051.06,1586.05 1113,1648 OLED.3
I2C_SDA: MCU1.43 OLED.4 R3.2 | length 639.7
  Top Layer w10: R3.2 723,1602 861,1740 OLED.4 ; R3.2@726.94,1565.53 761.47,1565.53 778.16,1548.84 MCU1.43
NetC3_2: C3.2 MCU1.22 | length 60.3
  Top Layer w10: C3.2 856.82,1023.29 856.82,1083.06 MCU1.22
NetCHARGE1_2: CHARGE1.2 R12.2 | length 127.6
  Top Layer w10: CHARGE1.2 983.93,590.07 983.93,626.92 1028.59,671.58 1028.59,693.06 R12.2
NetCHARGE1_6: CHARGE1.6 GREEN1.1 | length 311.5
  Top Layer w10: CHARGE1.6 934.11,373.75 934.11,340.11 GREEN1.1
NetCHARGE1_7: CHARGE1.7 RED1.1 | length 511.8
  Top Layer w10: CHARGE1.7 984,373.86 984,336 1107.89,212.11 1119.89,212.11 v3(1124,208) ; RED1.1 1271,147.64 v3(1271,72)
  Bottom Layer w10: v3(1124,208) 1129.5,208 1265.5,72 v3(1271,72)
NetGREEN1_2: GREEN1.2 R13.1 | length 75.9
  Top Layer w10: R13.1 1188,145.27 GREEN1.2
NetLED1_2: LED1.2 R8.2 | length 94.4
  Top Layer w10: LED1.2 1526.53,927 R8.2
NetR9_1: R9.1 USB-C1.B5 | length 148.5
  Top Layer w10: R9.1 1667.14,562.37 1690.66,585.9 USB-C1.B5
NetR10_1: R10.1 USB-C1.A5 | length 150.8
  Top Layer w10: R10.1 1665,498 1695.21,467.79 USB-C1.A5
NetR11_2: R11.2 RED1.2 | length 73.1
  Top Layer w10: R11.2 1328,149.7 RED1.2
NRST: C2.2 MCU1.7 R2.1 RST1.2 SWD.1 | length 1798.4
  Top Layer w10: C2.2 482.47,1753 R2.1 ; RST1.2 450,1857 483.47,1823.53 R2.1 ; v1(485,1686) 484.24,1686.76 484.24,1751.24 R2.1 ; v1(594,1205) 596.16,1207.16 MCU1.7 ; v1(1327,1578) 1327.5,1577.5 1451.5,1577.5 SWD.1
  Bottom Layer w10: v1(485,1686) 488,1686 595,1579 ; v1(594,1205) 595,1206 595,1579 ; v1(1327,1578) 596,1578 595,1579
SWCLK: MCU1.37 SWD.4 | length 737.4
  Top Layer w10: MCU1.37 MCU1.37 896.35,1457.35 v1(897,1458) ; v1(1259,1380) 1362,1277 SWD.4
  Bottom Layer w10: v1(897,1458) 1181,1458 v1(1259,1380)
SWDIO: MCU1.34 SWD.2 | length 655.6
  Top Layer w10: MCU1.34 958.1,1285.9 v3(1012,1232)
  Bottom Layer w10: v3(1012,1232) 1014,1230 1205,1230 SWD.2
SYS_PWR: C12.1 D2.2 Q1.3 REG1.1 REG1.3 | length 884.2
  Top Layer w19.68: D2.2 1138.24,437.58 1138.24,697.71 1149.78,709.24 Q1.3 ; C12.1 1283.32,843.53 1285.6,841.25 REG1.1 1285.6,736.65 Q1.3 ; REG1.3 1360.4,756.65 Q1.3
V_IN: R6.2 V_IN1.1 | length 231
  Top Layer w19.68: V_IN1.1@178,197.47 R6.2
V_SUM: D1.3 R5.2 R6.1 R7.1 U1.3 | length 687.3
  Top Layer w19.68: U1.3 159.16,590.03 107.03,590.03 77,560 77,398 149.37,325.63 D1.3 ; D1.3@201.08,322.55 338.92,322.55 R7.1 R5.2 R6.1
VBUS: F1.1 USB-C1.A4B9 USB-C1.B4A9 | length 513.4
  Top Layer w19.68: F1.1 1535.66,420 v3(1629,420) 1630.26,421.26 1734.54,421.26 USB-C1.A4B9 ; v3(1628,617) 1631.2,617 1636.71,611.49 USB-C1.B4A9
  Bottom Layer w19.68: v3(1628,617) 1628.5,616.5 1628.5,420.5 v3(1629,420)
VDDA: C1.2 C10.2 C11.2 D1.2 FB1.1 MCU1.9 R7.2 U1.8 | length 1543.1
  Top Layer w10: 614,1168 614.21,1167.79 MCU1.9
  Top Layer w15.75: 570.88,1167.79 613.79,1167.79 614,1168
  Top Layer w19.68: D1.2 163.6,400.43 196.03,368 321.54,368 335.06,381.53 R7.2 ; R7.2@342.94,381.53 464,502.59 C1.2 464,622.98 U1.8@394.98,692 ; U1.8 U1.8@394.98,692 ; 570.88,1167.79 561.79,1167.79 393.22,999.22 393.22,932 C11.2 393.34,873.58 563.89,873.58 FB1.1 564,761 495,692 U1.8@394.98,692
pads on no net: MCU1.2 MCU1.3 MCU1.4 MCU1.11 MCU1.12 MCU1.13 MCU1.14 MCU1.15 MCU1.16 MCU1.17 MCU1.18 MCU1.19 MCU1.20 MCU1.21 MCU1.25 MCU1.26 MCU1.27 MCU1.28 MCU1.29 MCU1.30 MCU1.31 MCU1.32 MCU1.33 MCU1.38 MCU1.39 MCU1.40 MCU1.41 MCU1.45 MCU1.46 REG1.4 U1.5 U1.6 U1.7 USB-C1.A6 USB-C1.A7 USB-C1.A8 USB-C1.B6 USB-C1.B7 USB-C1.B8 USB-C1.MH USB-C1.SH V_IN1.MH1 V_IN1.MH2

## Polygon pours and split planes (outlines as drawn)
GND on Bottom Layer "GND_L02_P069" (solid, pour order 69): 14,2017 1602,2017 1602,866 1987,866 1987,13 14,13
GND on Top Layer "NONET_L-01_P-001" (solid, remove dead copper, pour order 72): 1986.7,13.63 1986.7,866.63 1601.7,866.63 1601.7,2017.63 13.7,2017.63 13.7,13.63

## Silkscreen, mask and mechanical layers (free items; w line width, h text height)
Mechanical 1:
  the board outline again, w7.87

## Text inside footprints (layer, text, board x,y; h text height)
CHARGE1: Top Overlay "*" at 1049.97,611.64 h27.56 r270; Mechanical 13 "*" at 1003.5,558 h27.56 r270; Mechanical 13 "RefDes2" at 933,569.5 h27.56 r270